# EAGLE board MPU_2020 (EAGLE 9.3.0)
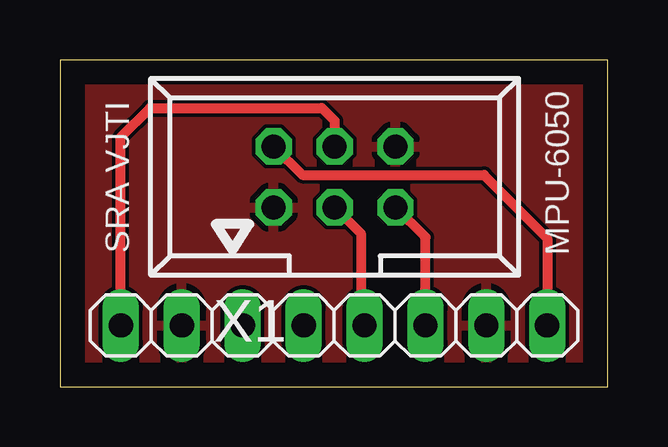
[diagram p0: board, top side]
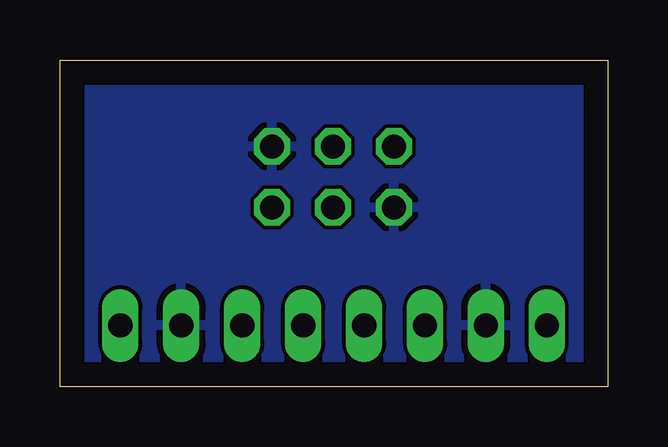
[diagram p1: board, bottom side, seen from below]

Size 22.84 x 13.64 mm. Coordinates in mm from the lower left corner, seen from the top.
Outline: 0,0 22.84,0 22.84,13.64 0,13.64 0,0
Copper layers (1*16): Top 0.035mm / dielectric 1.5mm / Bottom 0.035mm
Design rules "default": minimum track width 6mil, minimum drill 0.35mm, track to track 6mil, track to pad 6mil, pad to pad 6mil, via to via 6mil, smd to smd 6mil, copper to edge 40mil, drill to drill 6mil, minimum pad ring 10mil, minimum via ring 8mil, stop-mask expansion 4mil, vias tented up to drill 0mil, thermal gap 10mil

## Footprints (pad centres in the part's own frame; a part is rotated, then mirrored left to right if it is on the bottom)
1X08 = drill 1.016 long: 1 -8.89,0; 2 -6.35,0; 3 -3.81,0; 4 -1.27,0; 5 1.27,0; 6 3.81,0; 7 6.35,0; 8 8.89,0
057-006-1 = drill 1 octagon: 1 -2.54,-1.27; 2 -2.54,1.27; 3 0,-1.27; 4 0,1.27; 5 2.54,-1.27; 6 2.54,1.27

## Placement (x,y rotation side)
JP1  [1X08]  11.43,2.57 0 top
X1  057-006-1  [057-006-1]  11.46,8.76 0 top

## Library data of the parts
JP1 = pinhead
X1 = con-panduit; OC_FARNELL: unknown; OC_NEWARK: unknown

## Nets
5V: JP1.8 X1.2
GND: JP1.2 JP1.7 X1.1 X1.6
INT: JP1.1 X1.4
SCL: JP1.6 X1.5
SDA: JP1.5 X1.3

## Tracks (layer width: path | path; a pad name or v marks a point on that pad's centre or on a via)
5V
  Top 0.406: X1.2 10.11,8.84 17.68,8.84 20.32,6.2 JP1.8
GND
  pour Bottom: 0,0.03 0,13.56 0.03,13.59 3.84,13.59 22.78,13.59 22.81,13.56 22.81,0 22.78,-0.03 0,-0.03
  pour Top: 0,0 0,13.59 22.81,13.59 22.81,-0.03 0,-0.03
INT
  Top 0.406: JP1.1 2.54,10.41 3.76,11.63 10.92,11.63 11.46,11.1 X1.4
SCL
  Top 0.406: JP1.6 15.24,6.25 X1.5
SDA
  Top 0.152: 12.57,2.69 JP1.5
  Top 0.406: X1.3 12.55,6.4 12.55,2.72 JP1.5

## Text on the board
tNames: SRA VJTI | MPU-6050